# Altium PCB LOT_Watch.PcbDoc
Units mil, origin at the board's own origin, x right, y up, seen from the top; angles counter-clockwise.
Board outline 6000 x 4000 mil, 2 copper layers (Top Layer, Bottom Layer); 37 components, 29 nets, 145 pads, 0 vias.
Unrouted connection lines stored in the file: 84.
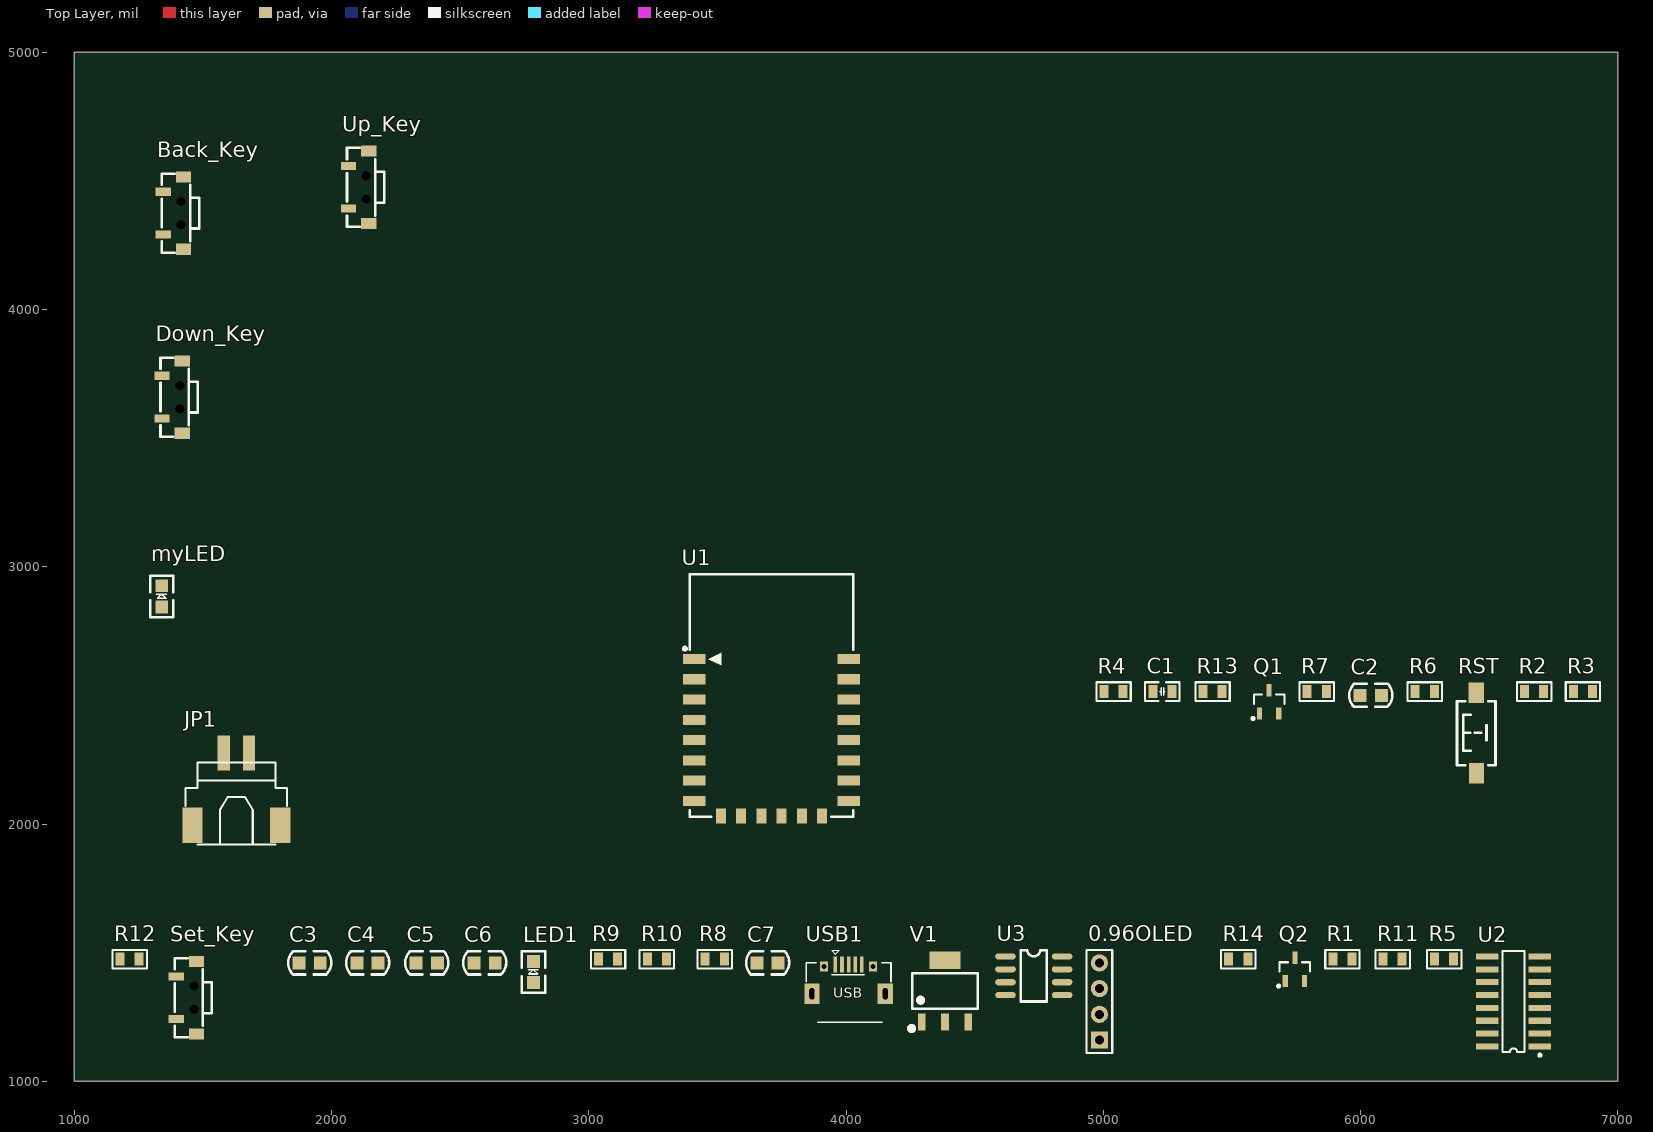
[diagram p0: Top Layer view]
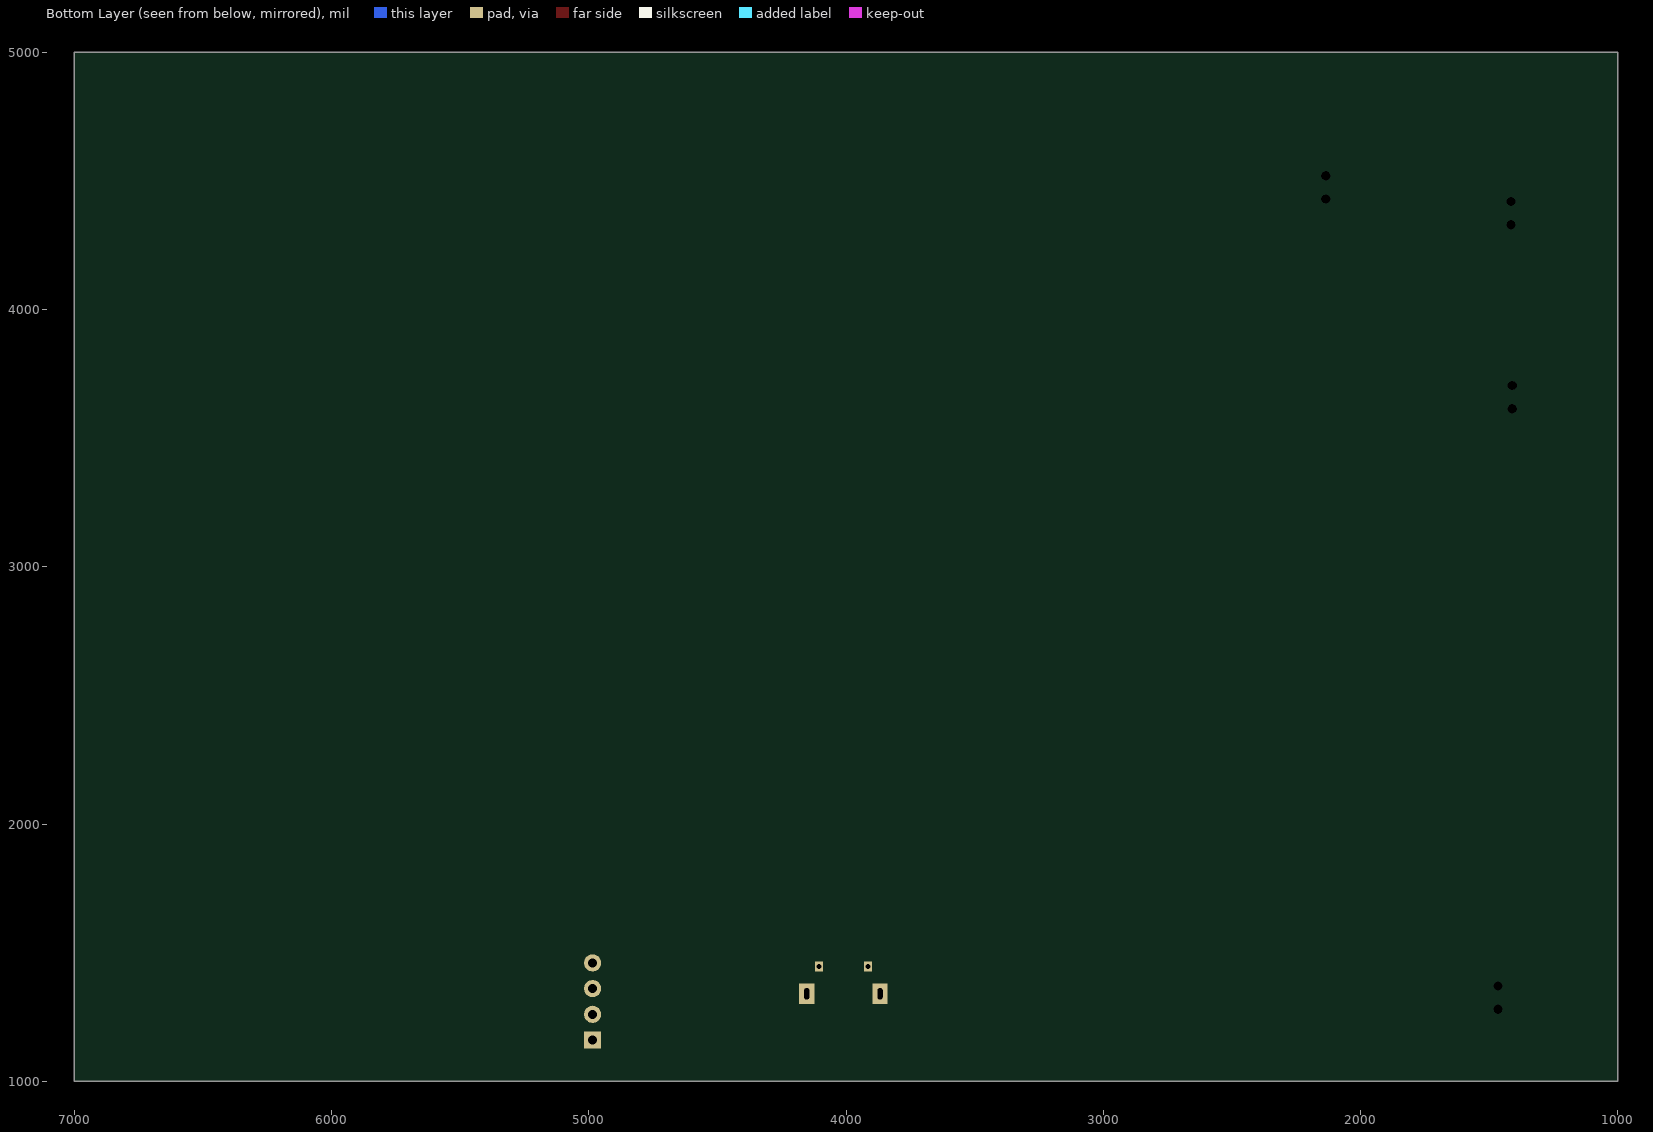
[diagram p1: Bottom Layer view, seen from below]

## Layer stack, top to bottom
Top Solder: solder mask 0.4, Solder Resist, Dk 3.5
Top Layer: signal copper 1.4
Dielectric 1: dielectric 12.6, FR-4, Dk 4.8
Bottom Layer: signal copper 1.4
Bottom Solder: solder mask 0.4, Solder Resist, Dk 3.5

## Board outline
1000,1000 7000,1000 7000,5000 1000,5000

## Design rules (kind name [scope] priority, off if disabled: settings)
Clearance [All] p1: gap=10 ignorepadtopadclearanceinfootprint=FALSE except(0: Arc-Hole Track-Hole SMDPad-Hole THPad-Hole Via-Hole Fill-Hole Poly-Hole Region-Hole Text-Hole)
PolygonConnect [All] p1: connectstyle=Relief reliefconductorwidth=10 reliefentries=4 polygonreliefangle="90 Angle" airgapwidth=10
RoutingVias [All] p1: holewidth=28 width=50 viastyle="Through Hole" minholewidth=28 minwidth=50 maxholewidth=28 maxwidth=50
SolderMaskExpansion [All] p1: expansion=4
Width [All] p1: maxlimit=10 minlimit=10 preferedwidth=10
30 further rules are at their usual default settings.

## Components (designator, comment, footprint, x,y, rotation, side; value= is the part's Value field where it differs from the comment)
0.96OLED "HDR-1X4" HDR2.54-M-LI-4P 4985,1310 r90 top
Back_Key "3x6x5" "TSW 3*6*4.3-S-W" 1415,4375 r90 top
C1 "100nF" "C 0805_L" 5230,2515 r0 top
C2 "Cap" C0805 6040,2500 r0 top
C3 "Cap" C0805 1915,1460 r0 top
C4 "Cap" C0805 2140,1460 r0 top
C5 "Cap" C0805 2370,1460 r0 top
C6 "Cap" C0805 2595,1460 r0 top
C7 "Cap" C0805 3695,1460 r0 top
Down_Key "3x6x5" "TSW 3*6*4.3-S-W" 1410,3659.72 r90 top
JP1 "HDR-1X2" XH2.54-WS-2P 1630,2080 r0 top
LED1 "LED" LED0805 2785,1425 r90 top
myLED "LED" LED0805 1340,2885 r90 top
Q1 "SS8050" SOT23-3N 5645,2475 r0 top
Q2 "SS8050" SOT23-3N 5745,1435 r0 top
R1 "10K" "R 0805_L" 5930,1475 r0 top
R2 "10k" "R 0805_L" 6675,2515 r0 top
R3 "10K" "R 0805_L" 6865,2515 r0 top
R4 "10K" "R 0805_L" 5040,2515 r0 top
R5 "10K" "R 0805_L" 6325,1475 r0 top
R6 "300" "R 0805_L" 6250,2515 r0 top
R7 "300" "R 0805_L" 5830,2515 r0 top
R8 "680" "R 0805_L" 3490,1475 r0 top
R9 "4.7k" "R 0805_L" 3075,1475 r0 top
R10 "4.7k" "R 0805_L" 3265,1475 r0 top
R11 "100k(1%)" "R 0805_L" 6125,1475 r0 top
R12 "680" "R 0805_L" 1215,1475 r0 top
R13 "10k" "R 0805_L" 5425,2515 r0 top
R14 "10k" "R 0805_L" 5525,1475 r0 top
RST "3x6x5" "TSW SMD-3*6*2.5" 6450,2355 r90 top
Set_Key "3x6x5" "TSW 3*6*4.3-S-W" 1465,1325 r90 top
U1 "ESP8266-12E" ESP_12E 3395.24,2641.22 r0 top
U2 "CH340G" SOP16M 6595,1310 r90 top
U3 "24C02" SOP-8 4730,1410 r0 top
Up_Key "3x6x5" "TSW 3*6*4.3-S-W" 2135,4475 r90 top
USB1 "USB-5P" USB-MICRO_A 4010,1340 r0 top
V1 "AMS1117-3V3" SOT223_L 4385,1350 r0 top

## Footprints (in the part's own frame and the unit in brackets; to place one, negate y for a bottom-side part, rotate by r counter-clockwise, add the part's x,y. Pads: shape width x height; smd on the part's side, far side on the other; paste and mask are expansions set on the pad)
C0805 [mil]
  rect 50x50 smd: 1(-41.35,0.05) 2(41.35,-0.05)
  silkscreen extent -83,-45 84,45, body extent -39,-25 40,22, height 37
"C 0805_L" [mil] "无极性贴片电容"
  rect 35x50 smd: 1(-37.4,0) 2(37.4,0)
  silkscreen extent -67,-36 67,36, body extent -39,-24 39,24, height 20
ESP_12E [mm] "ESP-12 Wi-Fi Module by AI-Thinker"
  rect 2.25x1 smd: 1(0.375,0) 2(0.375,-2) 3(0.375,-4) 4(0.375,-6) 5(0.375,-8) 6(0.375,-10) 7(0.375,-12) 8(0.375,-14) 15(15.625,-14) 16(15.625,-12) 17(15.625,-10) 18(15.625,-8) 19(15.625,-6) 20(15.625,-4) 21(15.625,-2) 22(15.625,0)
  rect 1x1.5 smd: 9(3,-15.5) 10(5,-15.5) 11(7,-15.5) 12(9,-15.5) 13(11,-15.5) 14(13,-15.5)
  silkscreen extent -0.7,-15.57 16.08,8.37, body extent 0,-15.49 16,8.51, height 2.75
HDR2.54-M-LI-4P [mm] "排母，4脚"
  rect 1.7x1.7 hole 0.9: 1(-3.81,0)
  round 1.7 hole 0.9: 2(-1.27,0) 3(1.27,0) 4(3.81,0)
  silkscreen extent -5.08,-1.27 5.08,1.27, body extent -5.08,-1.27 5.08,1.27, height 8.5
LED0805 [mil]
  rect 50x50 smd: A(-41.15,-0.1) K(41.15,0.1)
  silkscreen extent -81,-45 81,45, body extent -39,-25 39,25, height 20
"R 0805_L" [mil] "1/8W贴片电阻"
  rect 35x50 smd: 1(-37.4,0) 2(37.4,0)
  silkscreen extent -67,-36 67,36, body extent -39,-25 39,25, height 20
SOP16M [mm]
  rect 0.6x2.2 smd: 1(-4.445,-2.6) 2(-3.175,-2.6) 3(-1.905,-2.6) 4(-0.635,-2.6) 5(0.635,-2.6) 6(1.905,-2.6) 7(3.175,-2.6) 8(4.445,-2.6) 9(4.445,2.6) 10(3.175,2.6) 11(1.905,2.6) 12(0.635,2.6) 13(-0.635,2.6) 14(-1.905,2.6) 15(-3.175,2.6) 16(-4.445,2.6)
  silkscreen extent -5.42,-2.72 5,1.1
SOP-8 [mil]
  oval 80x24 smd: 1(-110,75) 2(-110,25) 3(-110,-25) 4(-110,-75) 5(110,-75) 6(110,-25) 7(110,25) 8(110,75)
  silkscreen extent -50,-100 50,100, body extent -123,-99 121,98, height 69
SOT23-3N [mm] "3x1.3x1mm(长宽高)"
  rect 0.5x1.2 smd: 1(-0.95,-1.143) 2(0.95,-1.143) 3(0,1.143)
  silkscreen extent -1.72,-1.78 1.5,0.7, body extent -1.5,-1.2 1.5,1.2, height 1.05
SOT223_L [mm] "6.4x7x1.6mm(长宽高)"
  rect 0.75x1.7 smd: 1(-2.3,-3.048) 2(0,-3.048) 3(2.3,-3.048)
  rect 3.1x1.7 smd: 2(0,3.048)
  silkscreen extent -3.5,-3.88 3.25,1.75, body extent -3.25,-3.51 3.25,3.51, height 1.65
"TSW 3*6*4.3-S-W" [mm] "侧立贴片3*6*4.3"
  rect 1.1x1.5 smd: 0(-3.575,-0.25) 0(3.575,-0.25)
  round 0 hole 0.9: 0(-1.15,0) 0(1.15,0)
  rect 0.8x1.5 smd: 1(2.1,1.75) 2(-2.1,1.75)
  silkscreen extent -3.9,-1.78 3.9,1.91, body extent -3.9,-1.79 3.9,1.91, height 3.51
"TSW SMD-3*6*2.5" [mm] "3*6*2.5mm"
  rect 2x1.5 smd: 1(-3.996,-0.02) 2(3.937,0)
  silkscreen extent -3.21,-1.9 3.09,1.9, body extent -4,-1.88 4,1.62, height 2.59
USB-MICRO_A [mm] "micro型USB ，5.7*7.8*2.5mm"
  rect 0.35x1.6 smd: 1(-1.3,2.9) 2(-0.65,2.9) 3(0,2.9) 4(0.65,2.9) 5(1.3,2.9)
  rect 1.5x2 hole 0.5 slot 1.1 at 90 deg: 5(-3.625,0) 5(3.625,0)
  rect 0.8x1 hole 0.5: 5(-2.425,2.71) 5(2.425,2.71)
  silkscreen extent -4.19,-2.79 4.19,4.3, body extent -4,-2.71 4,2.89, height 2.8
XH2.54-WS-2P [mm] "长：10mm，宽：8mm，高：6.1mm"
  rect 2x3.5 smd: 0(-4.327,-2.15) 0(4.327,-2.15)
  rect 1.2x3.5 smd: 1(-1.25,4.981) 2(1.25,4.981)
  silkscreen extent -5,-4.06 5,4.06, body extent -5,-4 5,6.42, height 6.05

## Part data
0.96OLED: library part "Header 4", "4P接插件", BOM名称=4P接插件, 学习资源=www.ooocke.com, 版权归属=源创客
Back_Key Down_Key RST Set_Key Up_Key: library part "TSW 3x6", "3x6轻触开关", BOM名称=3x6轻触开关, 学习资源=www.ooocke.com, 版权归属=源创客
C1: library part C, "无极性贴片电容", BOM名称=无极性贴片电容, 学习资源=www.ooocke.com, 版权归属=源创客
C2 C3 C4 C5 C6 C7: "电容", =100nF
JP1: library part "Header 2", "2P接插件", BOM名称=2P接插件, 学习资源=www.ooocke.com, 版权归属=源创客
LED1 myLED: "发光二极管"
Q1 Q2: library part 8050-SMD, "高频放大-NPN型", BOM名称=高频放大-NPN型, 学习资源=www.ooocke.com, 属性="40V 1.5A 1W 100MHZ", 版权归属=源创客
R1 R2 R3 R4 R5 R6 R7 R8 R9 R10 R11 R12 R13 R14: library part R, "贴片电阻", BOM名称=贴片电阻, 学习资源=www.ooocke.com, 版权归属=源创客
U1: "串口 WIFI模块，ESP-12E", BOM名称=WIFI模块, 学习资源=www.ooocke.com, 版权归属=源创客
U2: "USB2UART"
U3: library part 24C256
USB1: "微型USB母座", BOM名称=微型USB母座, 学习资源=www.ooocke.com, 版权归属=源创客
V1: library part AMS1117, "三端稳压芯片", BOM名称=稳压芯片, 学习资源=www.ooocke.com, 版权归属=源创客

## Nets (pads, with @x,y where several pads share a name; then routed paths per layer and width w, separated by ;. In a path a pad name is that pad's centre, name@x,y a point inside that pad or via, vN(x,y) a via of type N, cw(c..) or ccw(c..) an arc to the next point about the centre after c; other vN are vias at no path point)
3.3VCC: R2.2 R3.2 R4.2 R5.1 U1.8 U2.4
24C02SCL: R5.2 R9.1 U1.17 U3.6
24C02SDA: R1.1 R10.1 U1.16 U3.5
Back_key: Back_Key.1 U1.4
CH340RXD: R6.1 U2.3
CH340TXD: R7.1 U2.2
D+: U2.5 USB1.3
D-: U2.6 USB1.2
Down_key: Down_Key.1 U1.5
DTR: Q2.2 R13.1 U2.13
GND: 0.96OLED.1 Back_Key.2 C1.1 C2.1 C3.1 C4.1 C5.1 C6.1 C7.2 Down_Key.2 JP1.1 LED1.K R1.2 R11.1 RST.1 U1.15 U2.1 U3.1 U3.2 U3.3 U3.4 U3.7 Up_Key.2 USB1.5 V1.1
GPIO0: myLED.K Q2.3 R4.1 U1.18
NetLED1_A: LED1.A R8.2
NetmyLED_A: myLED.A R12.2
NetQ1_1: Q1.1 R13.2
NetQ2_1: Q2.1 R14.2
NetR3_1: R3.1 U1.3
NetR6_2: R6.2 U1.22
NetR7_2: R7.2 U1.21
NetR11_2: R11.2 U1.2
nRST: C1.2 Q1.3 R2.1 RST.2 U1.1
OLED_SCL: 0.96OLED.3 U1.19
OLED_SDA: 0.96OLED.4 U1.20
RTS: Q1.2 R14.1 U2.14
Set_key: Set_Key.1 U1.7
Up_key: U1.6 Up_Key.1
VCC: Set_Key.2
VCC3.3: 0.96OLED.2 C2.2 C5.2 C6.2 C7.1 JP1.2 R8.1 R9.2 R10.2 R12.1 U2.16 U3.8 V1.2
VCC5: C3.2 C4.2 USB1.1 V1.3
pads on no net: Back_Key.0 Down_Key.0 JP1.0 Set_Key.0 U1.9 U1.10 U1.11 U1.12 U1.13 U1.14 U2.7 U2.8 U2.9 U2.10 U2.11 U2.12 U2.15 Up_Key.0 USB1.4

## Text inside footprints (layer, text, board x,y; h text height)
U1: Mechanical 13 "ANTENNA AREA" at 3400.24,2951.22 h10; Mechanical 13 "CUTOUT POLYGON" at 3400.24,2931.22 h10
USB1: Top Overlay "USB" at 3950,1324.17 h40